# EAGLE board RC Receiver (EAGLE 6.5.0)
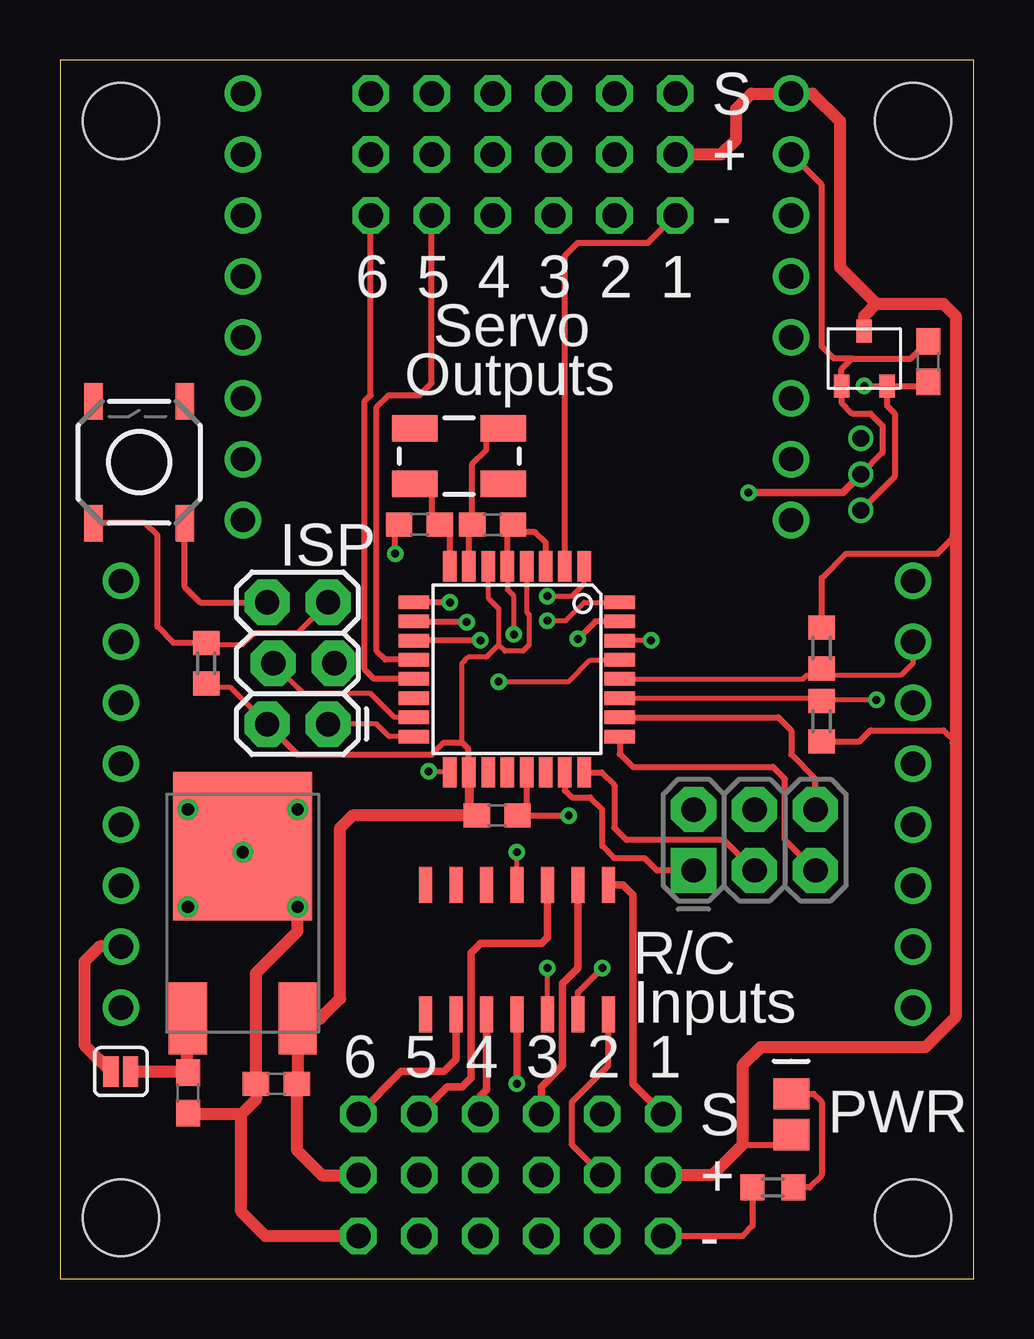
[diagram p0: board, top side]
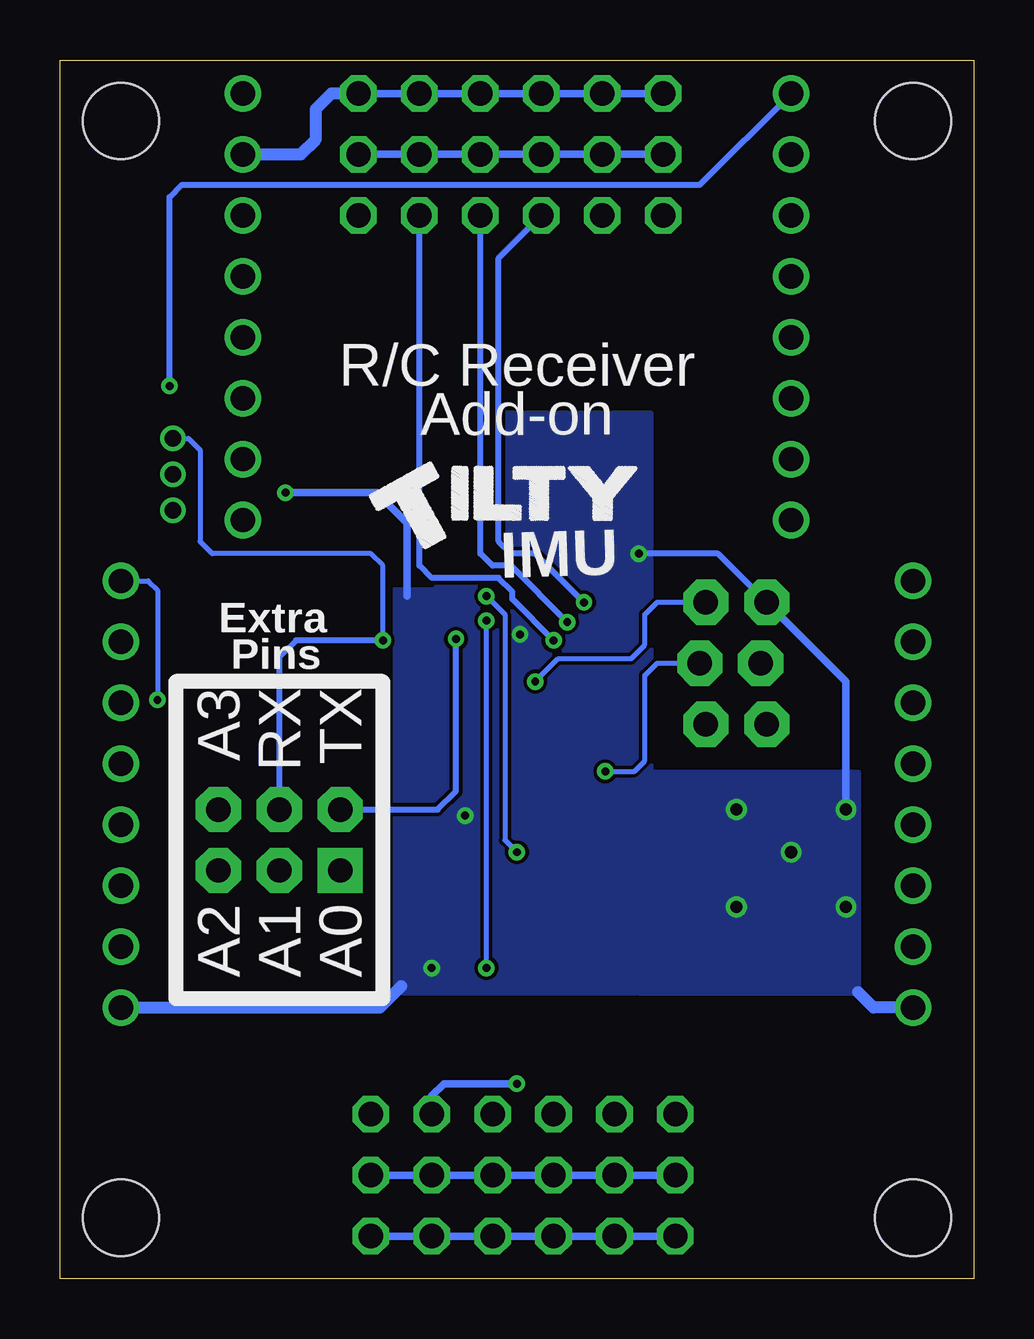
[diagram p1: board, bottom side, seen from below]

Size 38.1 x 50.8 mm. Coordinates in mm from the lower left corner, seen from the top.
Outline: 0,0 38.1,0 38.1,50.8 0,50.8 0,0
Copper layers (1*16): Top 0.0356mm / dielectric 1.5011mm / Bottom 0.0356mm
Design rules "LaenPCBOrder": minimum track width 6mil, minimum drill 13mil, track to track 6mil, track to pad 6mil, pad to pad 6mil, via to via 6mil, smd to smd 6mil, copper to edge 15mil, drill to drill 6mil, minimum pad ring 7mil, minimum via ring 7mil, stop-mask expansion 4mil, vias tented up to drill 0mil, thermal gap 10mil
Holes 3.17 mm at 2.54,2.54 2.54,48.26 35.56,48.26 35.56,2.54

## Footprints (pad centres in the part's own frame; a part is rotated, then mirrored left to right if it is on the bottom)
C0603 = smd 1.1 x 1: 1 -0.85,0; 2 0.85,0
LED-0805 = smd 1.3 x 1.5: 1 -0.85,0; 2 0.85,0
1X08_NO_SS = drill 1.016: 1 -8.89,0; 2 -6.35,0; 3 -3.81,0; 4 -1.27,0; 5 1.27,0; 6 3.81,0; 7 6.35,0; 8 8.89,0
3X6_PTH_HEADER = drill 1.016 octagon: 1 -6.35,-2.54; 2 -6.35,0; 3 -6.35,2.54; 4 -3.81,-2.54; 5 -3.81,0; 6 -3.81,2.54; 7 -1.27,-2.54; 8 -1.27,0; 9 -1.27,2.54; 10 1.27,-2.54; 11 1.27,0; 12 1.27,2.54; 13 3.81,-2.54; 14 3.81,0; 15 3.81,2.54; 16 6.35,-2.54; 17 6.35,0; 18 6.35,2.54
2X3_LOCK = drill 1.016 pad 1.88 octagon: 1 0,0; 2 0,2.54; 3 2.54,-0.254; 4 2.54,2.286; 5 5.08,0; 6 5.08,2.54
3-PIN_JST_ZH_CONNECTOR_TH = drill 0.7: P$1 -1.5,1.6; P$2 0,1.6; P$3 1.5,1.6
2X3-NS = drill 1.016 pad 1.88 square: 1 -2.54,-1.27 | drill 1.016 pad 1.88 octagon: 2 -2.54,1.27; 3 0,-1.27; 4 0,1.27; 5 2.54,-1.27; 6 2.54,1.27
R0603 = smd 1 x 1.1: 1 -0.85,0; 2 0.85,0
TACTILE_SWITCH_SMD = smd 1.524 x 0.762: 1 -2.54,1.905; 2 2.54,1.905; 3 -2.54,-1.905; 4 2.54,-1.905
SJ_2S = smd 0.635 x 1.27: 1 -0.412,0; 2 0.412,0
TQFP32-08 = smd 1.27 x 0.559: 1 -4.293,2.8; 2 -4.293,2; 3 -4.293,1.2; 4 -4.293,0.4; 5 -4.293,-0.4; 6 -4.293,-1.2; 7 -4.293,-2; 8 -4.293,-2.8; 17 4.293,-2.8; 18 4.293,-2; 19 4.293,-1.2; 20 4.293,-0.4; 21 4.293,0.4; 22 4.293,1.2; 23 4.293,2; 24 4.293,2.8 | smd 0.559 x 1.27: 9 -2.8,-4.293; 10 -2,-4.293; 11 -1.2,-4.293; 12 -0.4,-4.293; 13 0.4,-4.293; 14 1.2,-4.293; 15 2,-4.293; 16 2.8,-4.293; 25 2.8,4.293; 26 2,4.293; 27 1.2,4.293; 28 0.4,4.293; 29 -0.4,4.293; 30 -1.2,4.293; 31 -2,4.293; 32 -2.8,4.293
TO263 = smd 5.791 x 6.198: P$1 0,2.794 | smd 1.6 x 2.997: P$2 -2.286,-4.394; P$3 2.286,-4.394
SOT23 = smd 0.65 x 0.95: P$1 -0.95,-1.15; P$2 0.95,-1.15; P$3 0,1.15
14-SOIC = smd 0.55 x 1.5: P$1 -3.81,-2.7; P$2 -2.54,-2.7; P$3 -1.27,-2.7; P$4 0,-2.7; P$5 1.27,-2.7; P$6 2.54,-2.7; P$7 3.81,-2.7; P$8 3.81,2.7; P$9 2.54,2.7; P$10 1.27,2.7; P$11 0,2.7; P$12 -1.27,2.7; P$13 -2.54,2.7; P$14 -3.81,2.7
CRYSTAL-SMD-5X3 = smd 1.9 x 1.1: 1 -1.85,-1.15; 2 1.85,-1.15; 3 1.85,1.15; 4 -1.85,1.15

## Placement (x,y rotation side)
C1  22pF  [C0603]  14.99,31.43 0 top
C2  22pF  [C0603]  18.03,31.43 180 top
C3  0.1uF  [C0603]  18.22,19.3 0 top
C4  0.1uF  [C0603]  36.2,38.23 90 top
C6  4.7uF  [C0603]  9.02,8.13 180 top
C7  0.1uF  [C0603]  5.33,7.75 270 top
D1  [LED-0805]  30.48,6.86 90 top
JP1  [1X08_NO_SS]  7.62,40.51 90 top
JP2  [1X08_NO_SS]  2.54,20.19 90 top
JP3  [1X08_NO_SS]  35.56,20.19 90 top
JP4  [1X08_NO_SS]  30.48,40.51 90 top
JP5  Output  [3X6_PTH_HEADER]  19.3,46.86 0 top
JP6  AVR_SPI_PRG_62X3_LOCK  [2X3_LOCK]  11.18,23.11 90 top
JP7  Input  [3X6_PTH_HEADER]  18.8,4.32 180 top
JP8  3-PIN_JST_ZH_PTH_CONNECTORRIGHT_ANGLE_PTH  [3-PIN_JST_ZH_CONNECTOR_TH]  34.99,33.53 90 top
JP10  [2X3-NS]  28.96,18.29 0 top
R1  10k  [R0603]  6.1,25.65 90 top
R2  [R0603]  31.75,23.24 270 top
R3  [R0603]  31.75,26.29 90 top
R4  220  [R0603]  29.72,3.81 0 top
S1  SWITCH-MOMENTARY-2SMD  [TACTILE_SWITCH_SMD]  3.3,34.04 90 top
SJ1  SOLDERJUMPERNC  [SJ_2S]  2.54,8.64 0 top
U1  ATMEGA328P  [TQFP32-08]  19.05,25.4 270 top
U2  LM2931  [TO263]  7.62,15.24 0 top
U3  AP7313SOT23R  [SOT23]  33.53,38.35 0 top
U4  C74HC407514-SOIC  [14-SOIC]  19.05,13.72 180 top
Y1  16MHz  [CRYSTAL-SMD-5X3]  16.64,34.29 0 top

## Library data of the parts
C1-C4 C6 C7 R1-R4 = resistor
D1 = SparkFun-LED
JP1-JP4 = pinhead
JP5 JP7 = My Parts
JP6 JP10 = SparkFun-Connectors
JP8 = My Parts; PART#: 455-1670-ND
S1 = SparkFun-Electromechanical
SJ1 = SparkFun-Passives
U1 = SparkFun-DigitalIC; PROD_ID: IC-09069
U2 = on-semiconductor; PART#: lm2931
U3 = My Parts; PART#: AP7313-33SRG-7
U4 = My Parts; PART#: 296-14534-1-ND
Y1 = SparkFun-FreqCtrl; PART#: 887-1104-1-ND

## Nets
+3V3: C4.1 JP1.8 JP8.P$1 U3.P$2
+5V: C3.1 C6.1 D1.1 JP4.8 JP5.2 JP5.5 JP5.8 JP5.11 JP5.14 JP5.17 JP6.2 JP7.2 JP7.5 JP7.8 JP7.11 JP7.14 JP7.17 R1.1 R2.2 R3.2 U1.4 U1.6 U1.18 U2.P$3 U3.P$3 U4.P$14
+24V: C7.1 SJ1.2 U2.P$2
A0: JP10.1 U1.23
A1: JP10.3 U1.24
A2: JP10.5 U1.25
A3: JP10.6 U1.26
ARDUINO_TX: JP10.2 U1.31
EVEN_CHAN: U1.32 U4.P$12
GND: C1.1 C2.1 C3.2 C4.2 C6.2 C7.2 JP2.1 JP3.1 JP4.7 JP5.3 JP5.6 JP5.9 JP5.12 JP5.15 JP5.18 JP6.6 JP7.3 JP7.6 JP7.9 JP7.12 JP7.15 JP7.18 JP8.P$2 R4.1 S1.3 U1.3 U1.5 U1.21 U2.P$1 U3.P$1 U4.P$13
MISO: JP6.1 U1.16
MOSI: JP6.4 U1.15
N$1: C2.2 U1.7 Y1.3
N$2: C1.2 U1.8 Y1.1
N$5: JP2.2 SJ1.1
N$8: D1.2 R4.2
ODD_CHAN: U1.1 U4.P$4
RESET: JP6.5 R1.2 S1.1 U1.29
SATELLITE_TX: JP8.P$3 JP10.4 U1.30
SCK: JP6.3 U1.17
SCL: JP3.7 R3.1 U1.28
SDA: JP3.8 R2.1 U1.27
SERVO_1: JP5.1 U1.13
SERVO_2: JP5.4 U1.12
SERVO_3: JP5.7 U1.9
SERVO_4: JP5.10 U1.10
SERVO_5: JP5.13 U1.11
SERVO_6: JP5.16 U1.2
SIGNAL_1: JP7.1 U4.P$1
SIGNAL_2: JP7.4 U4.P$11
SIGNAL_3: JP7.7 U4.P$2
SIGNAL_4: JP7.10 U4.P$10
SIGNAL_5: JP7.13 U4.P$3
SIGNAL_6: JP7.16 U4.P$9

## Tracks (layer width: path | path; a pad name or v marks a point on that pad's centre or on a via)
+3V3  (via drill 0.33)
  Top 0.254: U3.P$2 36.02,37.2 C4.1 | U3.P$2 34.48,36.39 34.8,36.07 34.8,33.44 JP8.P$1 | v33.53,37.21 U3.P$2
  Bottom 0.254: v33.53,37.21 33.53,45.09 33.02,45.59 11.43,45.59 JP1.8
+5V
  Top 0.203: JP6.2 7.11,24.64 6.26,24.64 R1.1 | 16.76,22.35 16.76,25.65 17.02,25.91 17.78,25.91 18.29,26.42 | U1.4 19.45,27.79 19.56,27.69 19.56,26.42 19.3,26.16 18.54,26.16 18.29,26.42 | U1.6 17.85,28.38 18.29,27.94 18.29,26.42
  Top 0.254: JP7.5 21.34,5.59 21.34,7.37 22.86,8.89 U4.P$14 | JP6.2 9.91,21.84 15.49,21.84 16,22.35 16.76,22.35 17.02,22.1 17.02,21.14 U1.18 | 17.05,19.69 C3.1 | R2.2 33.31,22.39 33.78,22.86 36.83,22.86 37.34,22.35 | R3.2 31.75,29.21 32.77,30.23 36.58,30.23 37.34,30.99 | 28.45,5.59 30.06,5.59 D1.1
  Top 0.381: U1.18 17.05,19.69
  Top 0.508: C3.1 12.19,19.3 11.68,18.8 11.68,11.68 10.85,10.85 U2.P$3 9.91,8.17 C6.1 9.87,5.37 10.92,4.32 JP7.17 | U3.P$3 33.53,40.13 34.04,40.64 | 34.04,40.64 36.83,40.64 37.34,40.13 37.34,30.99 37.34,22.35 37.34,10.92 36.07,9.65 29.21,9.65 28.45,8.89 28.45,5.59 27.18,4.32 JP7.2 | JP5.17 27.56,46.86 28.19,47.5 28.19,48.77 28.83,49.4 JP4.8 31.37,49.4 32.51,48.26 32.51,42.16 34.04,40.64
  Bottom 0.318: JP7.2 JP7.5 JP7.8 JP7.11 JP7.14 JP7.17 | JP5.2 JP5.5 JP5.8 JP5.11 JP5.14 JP5.17
+24V
  Top 0.508: SJ1.2 5.29,8.64 | 5.29,8.64 C7.1 | 5.29,8.64 5.29,10.81 U2.P$2
A0
  Top 0.254: JP10.1 24.89,17.02 24.38,17.53 23.11,17.53 22.61,18.03 22.61,19.56 22.1,20.07 21.34,20.07 21.05,20.35 U1.23
A1
  Top 0.254: JP10.3 27.69,18.29 23.62,18.29 23.11,18.8 23.11,20.57 22.58,21.11 U1.24
A2
  Top 0.254: JP10.5 30.23,18.29 30.23,20.83 30.1,20.95 29.72,21.34 23.88,21.34 23.34,21.87 U1.25
A3
  Top 0.254: U1.26 29.94,23.4 30.48,22.86 30.48,21.84 31.5,20.83 JP10.6
ARDUINO_TX  (via drill 0.33)
  Top 0.254: U1.31 22.32,27.4 v21.59,26.67
  Bottom 0.254: JP10.2 22.35,19.56 21.59,20.32 v21.59,26.67
EVEN_CHAN  (via drill 0.33)
  Top 0.203: U4.P$12 v20.32,12.95 | v20.32,27.43 21.08,27.43 21.84,28.19 U1.32
  Bottom 0.203: v20.32,12.95 v20.32,27.43
GND  (via drill 0.33, 0.51)
  Top 0.203: v18.92,26.86 18.92,28.45 18.65,28.72 U1.5
  Top 0.254: U1.5 18.65,31.2 C2.1 19.2,31.11 19.81,31.11 20.25,30.68 U1.3 | U1.21 19.45,19.62 C3.2 v21.21,19.3 | 33.02,38.35 32.58,37.91 U3.P$1 32.58,36.51 33.02,36.07 33.78,36.07 34.29,35.56 34.29,34.43 JP8.P$2 | 33.02,38.35 35.47,38.35 C4.2 | 33.02,38.35 32.26,38.35 31.75,38.86 31.75,45.59 JP4.7 | U4.P$13 21.59,11.94 v22.61,12.95 | v13.97,30.23 13.97,31.27 C1.1 | R4.1 28.87,2.2 28.45,1.78 JP7.3 | JP6.6 5.84,28.19 5.21,28.83 S1.3
  Top 0.318: v28.7,32.77 32.63,32.77 JP8.P$2 | U2.P$1 v7.62,17.78
  Top 0.508: 7.56,6.86 8.17,7.47 C6.2 8.17,12.74 9.91,14.48 v9.91,15.49 | 7.56,6.86 5.37,6.86 C7.2 | JP7.18 8.57,1.78 7.56,2.79 7.56,6.86
  Bottom 0.254: JP6.6 10.67,30.23 v13.97,30.23
  Bottom 0.318: JP7.18 JP7.15 JP7.12 JP7.9 JP7.6 JP7.3 | JP5.3 JP5.6 JP5.9 JP5.12 JP5.15 JP5.18 | v28.7,32.77 24.89,32.77 23.62,31.5 23.62,28.45 | v5.33,19.56 5.33,24.89 JP6.6
  Bottom 0.508: JP5.18 26.8,49.4 27.43,48.77 27.43,47.5 28.07,46.86 JP4.7 | JP2.1 4.19,11.3 4.83,11.94 | JP3.1 24.77,11.3 23.88,12.19
  other vias: 9.91,19.56 5.33,15.49
  pour Bottom: 13.46,36.07 24.13,36.07 24.13,11.94 13.46,11.94
  pour Bottom: 13.97,11.94 4.83,11.94 4.83,21.08 13.97,21.08
MISO
  Top 0.203: U1.16 13.72,22.6 13.21,23.11 JP6.1
MOSI
  Top 0.203: JP6.4 9.91,24.64 10.16,24.38 12.95,24.38 13.94,23.4 U1.15
N$1
  Top 0.254: U1.7 17.05,31.3 C2.2 17.18,33.95 17.78,34.54 17.78,35.31 18.35,35.31 Y1.3
N$2
  Top 0.254: U1.8 16.25,31.02 C1.2 15.49,31.77 15.49,32.77 15.12,33.14 Y1.1
N$3
  cutout Bottom: 22.61,36.58 25.65,36.58 25.65,36.32 25.65,28.96 22.61,28.96
N$5
  Top 0.508: JP2.2 1.65,13.84 1.02,13.21 1.02,9.75 SJ1.1
N$8
  Top 0.254: D1.2 31.41,7.71 31.75,7.37 31.75,4.32 31.24,3.81 R4.2
ODD_CHAN  (via drill 0.33)
  Top 0.203: U4.P$4 v19.05,17.78 | v20.32,28.45 21.34,28.45 21.84,28.96 U1.1
  Bottom 0.203: v20.32,28.45 19.56,27.69 19.56,18.29 v19.05,17.78
RESET  (via drill 0.33)
  Top 0.203: JP6.5 9.91,26.92 8.13,26.92 7.62,26.42 6.18,26.42 R1.2 | 23.3,25.84 U1.29 23.32,25.78 22.1,25.78 21.21,24.89 v18.29,24.89
  Top 0.254: R1.2 4.74,26.5 4.06,27.18 4.06,30.99 3.56,31.5 S1.1
  Bottom 0.203: JP6.5 13.21,28.19 13.72,27.69 13.72,26.42 14.29,25.84 17.34,25.84 v18.29,24.89
SATELLITE_TX  (via drill 0.33)
  Top 0.203: v24.64,26.61 U1.30
  Bottom 0.203: v24.64,26.61 24.64,29.72 25.15,30.23 31.75,30.23 32.26,30.73 32.26,34.54 32.74,35.03 JP8.P$3
  Bottom 0.254: v24.64,26.61 28.26,26.61 28.96,25.91 JP10.4
SCK  (via drill 0.33)
  Top 0.203: v15.37,21.14 16.21,21.14 U1.17
  Bottom 0.203: JP6.3 13.21,25.65 13.72,25.15 13.72,21.59 14.16,21.14 v15.37,21.14
SCL
  Top 0.203: JP3.7 35.56,25.65 35.05,25.15 32.04,25.15 R3.1 31.46,25.15 31.11,25.15 30.97,25 U1.28
SDA  (via drill 0.33)
  Top 0.203: v34.04,24.13 31.79,24.13 R2.1 31.64,24.2 U1.27
  Bottom 0.203: JP3.8 34.42,29.08 34.04,28.7 v34.04,24.13
SERVO_1
  Top 0.254: U1.13 13.1,25 12.7,25.4 12.7,36.58 12.95,36.83 JP5.1
SERVO_2
  Top 0.254: U1.12 13.57,25.8 13.21,26.16 13.21,36.32 13.72,36.83 14.99,36.83 15.49,37.34 JP5.4
SERVO_3  (via drill 0.33)
  Top 0.254: v16.26,28.19 U1.9
  Bottom 0.254: v16.26,28.19 18.29,30.23 19.3,30.23 19.81,30.73 19.81,42.55 JP5.7
SERVO_4  (via drill 0.33)
  Top 0.254: v16.95,27.37 14.79,27.37 U1.10
  Bottom 0.254: v16.95,27.37 19.3,29.72 20.07,29.72 20.57,30.23 JP5.10
SERVO_5  (via drill 0.33)
  Top 0.254: v17.53,26.61 U1.11
  Bottom 0.254: v17.53,26.61 19.24,28.32 19.24,28.64 19.81,29.21 22.61,29.21 23.11,29.72 JP5.13
SERVO_6
  Top 0.254: U1.2 21.05,42.64 21.59,43.18 24.51,43.18 JP5.16
SIGNAL_1
  Top 0.318: U4.P$1 23.46,16.42 23.88,16 23.88,8.13 JP7.1
SIGNAL_2  (via drill 0.33)
  Top 0.318: v19.05,8.13 U4.P$11
  Bottom 0.318: JP7.4 22.61,7.62 22.1,8.13 v19.05,8.13
SIGNAL_3
  Top 0.318: JP7.7 20.07,8 20.95,8.89 20.95,12.32 21.59,12.95 U4.P$2
SIGNAL_4
  Top 0.318: JP7.10 17.53,7.62 17.78,7.87 U4.P$10
SIGNAL_5
  Top 0.318: U4.P$3 20.32,14.22 20.07,13.97 17.53,13.97 17.14,13.59 17.14,8.38 16.76,8 16.13,8 JP7.13
SIGNAL_6
  Top 0.318: JP7.16 14.22,8.64 16,8.64 16.51,9.14 U4.P$9

## Text on the board
tNames: S | + | - | 6 | 5 | 4 | 3 | 2 | 1 | Servo | Outputs | ISP | R/C | Inputs | 6 | 5 | 4 | 3 | 2 | 1 | S | PWR | + | -
bNames: R/C Receiver | Add-on | IMU | Extra | TX | RX | Pins | A3 | A0 | A1 | A2